# Altium PCB BLE-T1.PcbDoc (part 1 of 2)
Units mm, origin at the board's own origin, x right, y up, seen from the top; angles counter-clockwise.
Board outline 285.25 x 94.86 mm, 2 copper layers (Component Side, Bottom Layer), stack 1.571 mm thick; 182 components, 142 nets, 832 pads, 32 vias.
Unrouted connection lines stored in the file: 3.
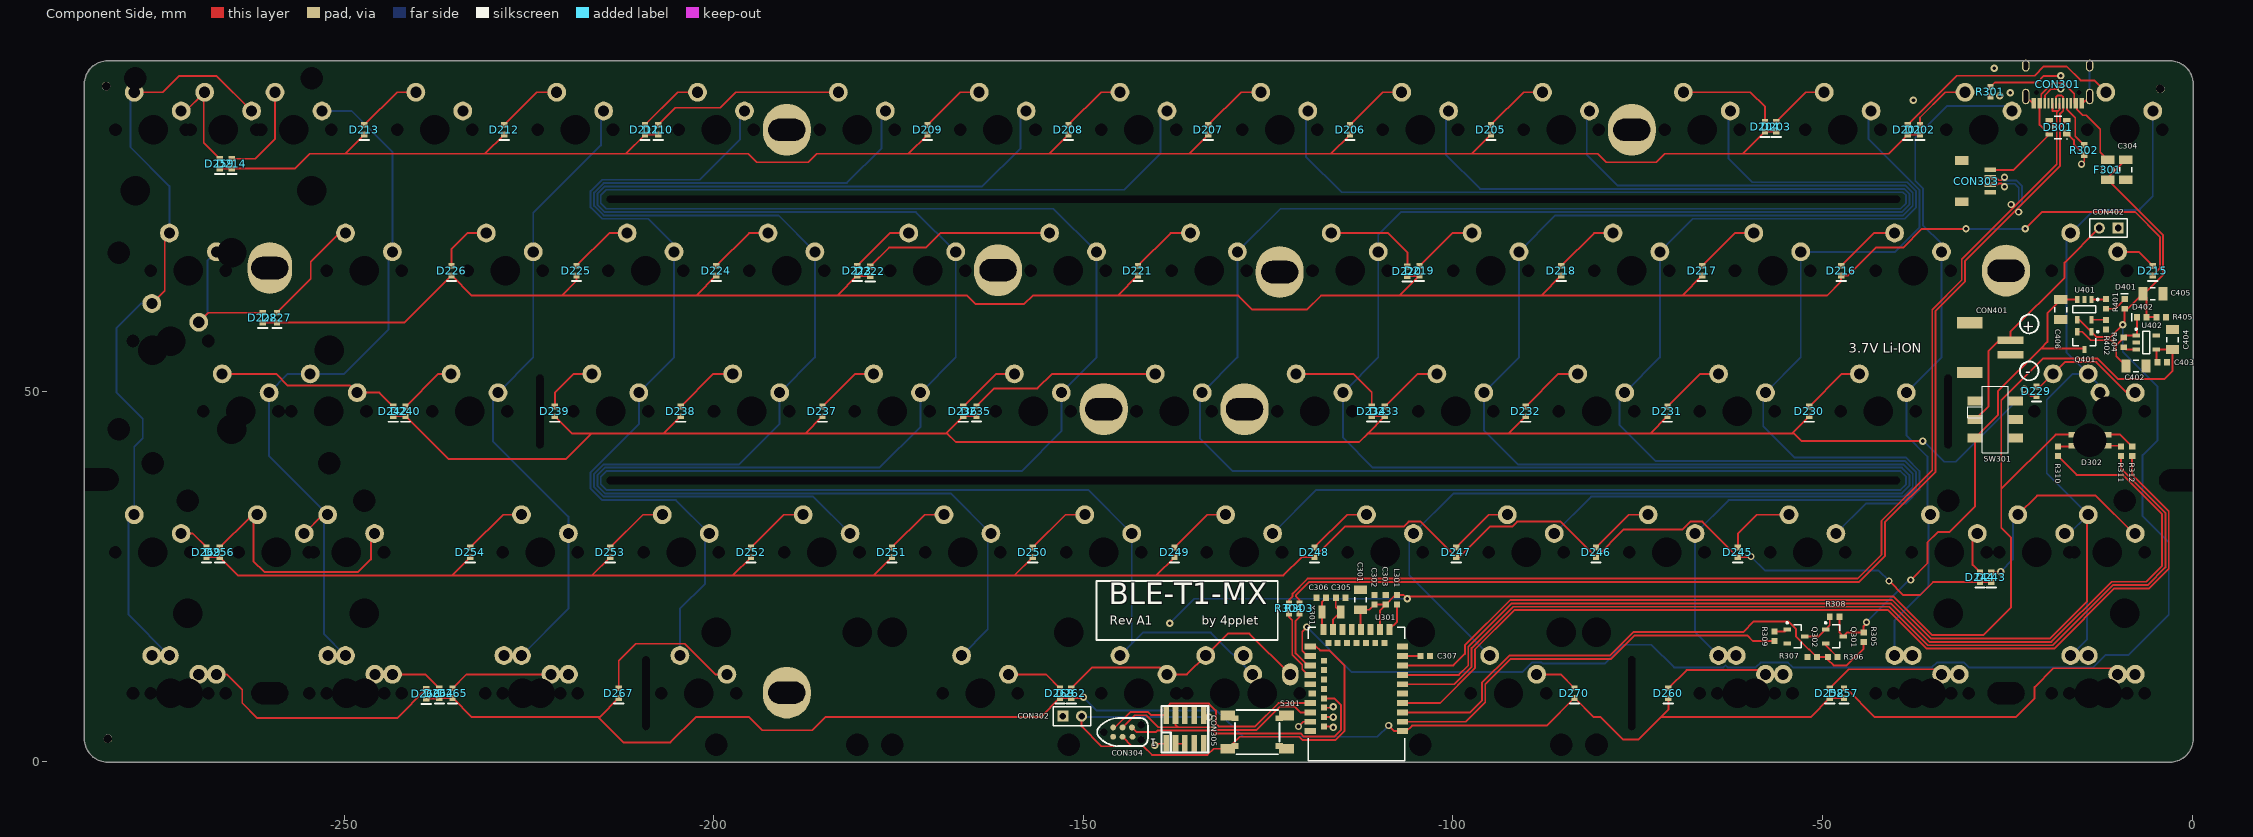
[diagram p0: Component Side view]
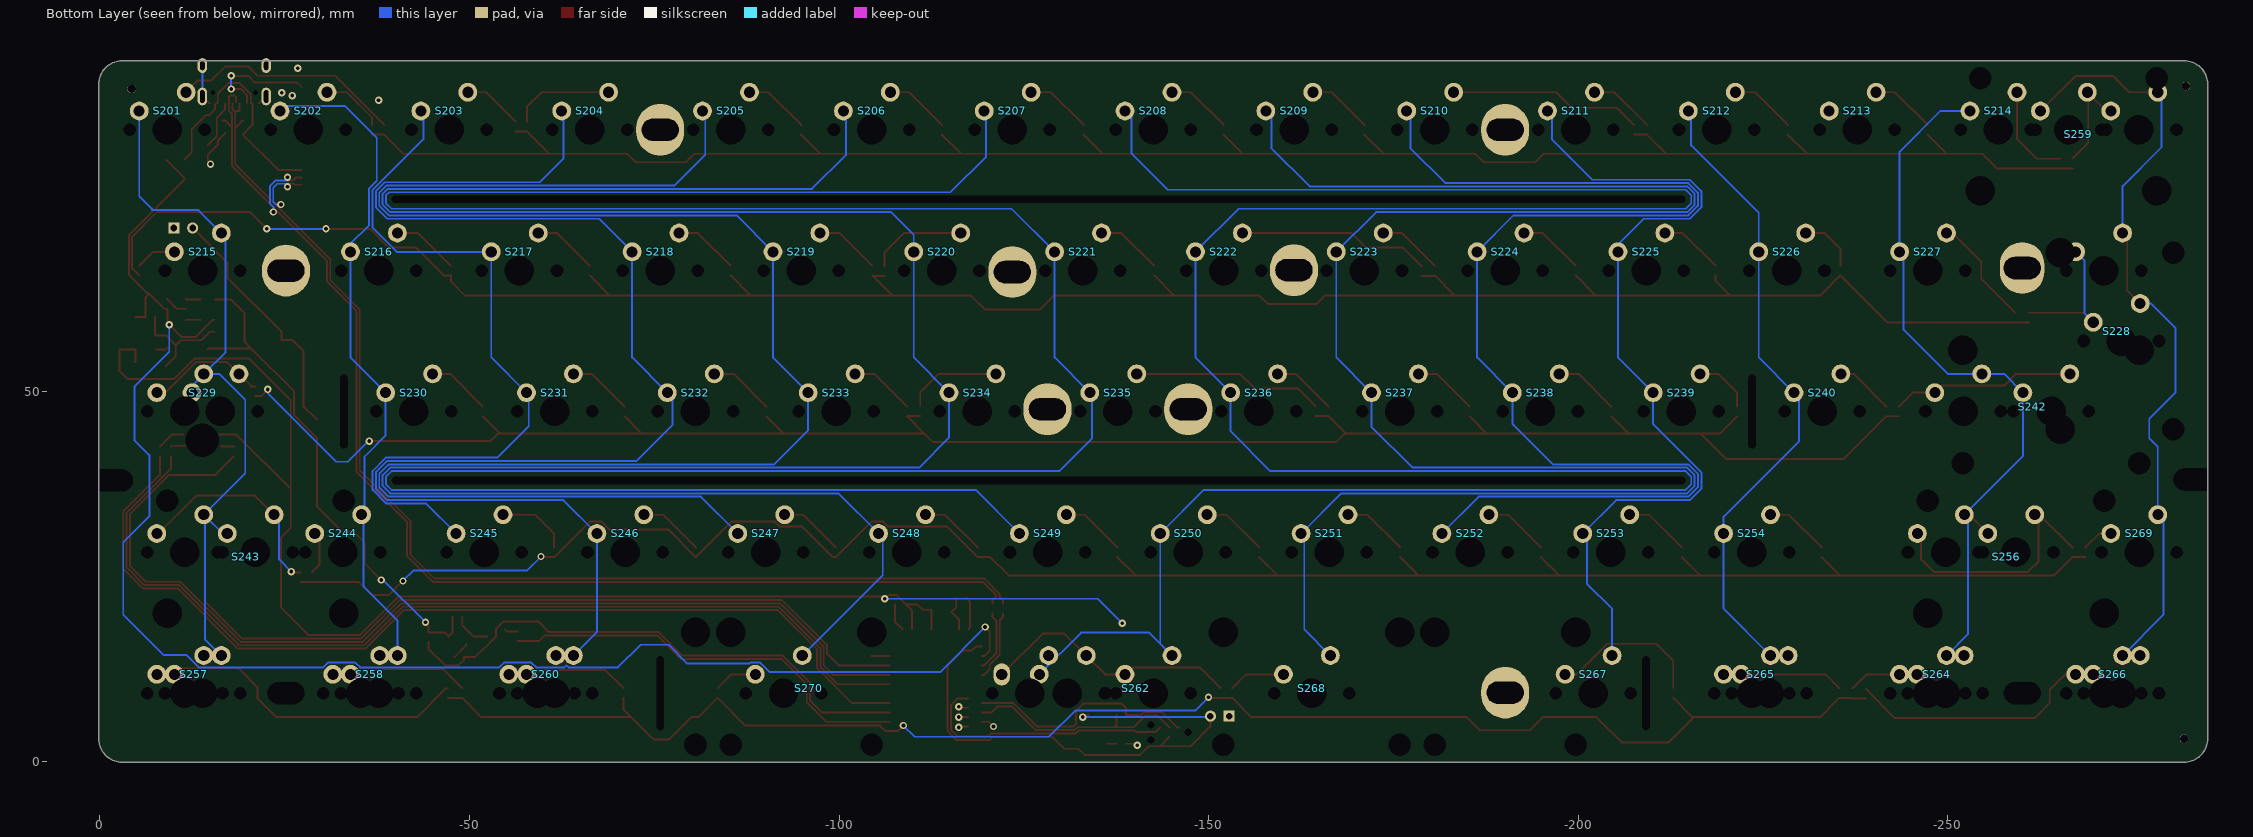
[diagram p1: Bottom Layer view, seen from below]
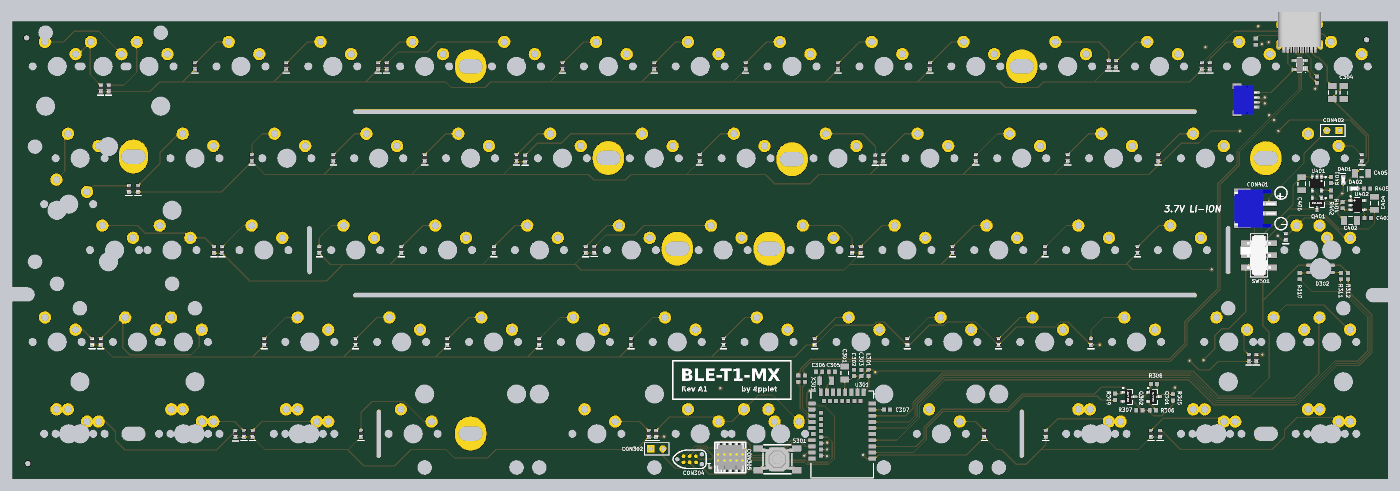
[diagram p3: 3D render of the assembled board from above, using the file's embedded part models]

## Layer stack, top to bottom
Top Solder: solder mask 0.0102, Solder Resist, Dk 3.5
Component Side: signal copper 0.0356
Dielectric 1: core 1.5, FR-4, Dk 4.2
Bottom Layer: signal copper 0.0356
Solder Side: solder mask 0.0102, Solder Resist, Dk 3.5

## Board outline
-285.127,3.01 ccw(c-282,3.01) -282,-0.117 ccw(c-282,0.01) -281.965,-0.112 -3.035,-0.112 ccw(c-3,0.01) -3,-0.117 ccw(c-3,3.01) 0.127,3.01 0.127,91.615 ccw(c-3,91.615) -3,94.742 ccw(c-3,94.615) -3.024,94.74 ccw(c-3.048,94.615) -3.048,94.742 -119.253,94.742 ccw(c-119.253,94.615) -119.273,94.741 ccw(c-119.294,94.615) -119.294,94.742 -198.628,94.742 ccw(c-198.628,94.615) -198.629,94.742 -282,94.742 ccw(c-282,91.615) -285.127,91.615

## Design rules (kind name [scope] priority, off if disabled: settings)
Clearance [All] p1: gap=0.2 ignorepadtopadclearanceinfootprint=FALSE except(0: Arc-Hole Track-Hole SMDPad-Hole THPad-Hole Via-Hole Fill-Hole Poly-Hole Region-Hole Text-Hole; 0.254: THPad-THPad THPad-Via THPad-Fill THPad-Poly THPad-Region THPad-Text Via-Via Via-Fill Via-Poly Via-Region Via-Text Fill-Fill Fill-Poly Fill-Region Fill-Text Poly-Poly Poly-Region Poly-Text Region-Region Region-Text Text-Text)
ComponentClearance [InComponent('No Component') And OnLayer('Component Side')] p1: gap=0.254 collisioncheckmode=3 verticalgap=0.254 showdistances=FALSE
DiffPairsRouting DiffPairsRouting_USB [InDifferentialPairClass('All Differential Pairs')] p1: maxlimit=0.254 minlimit=0.203 mostfreqgap=0.203 toplayer_minwidth=0.152 toplayer_maxwidth=0.381 toplayer_prefwidth=0.152 bottomlayer_minwidth=0.152 bottomlayer_maxwidth=0.381 bottomlayer_prefwidth=0.152 maxuncoupledlength=12.7
DiffPairsRouting [All] p2: maxlimit=0.254 minlimit=0.254 mostfreqgap=0.254 toplayer_minwidth=0.381 toplayer_maxwidth=0.381 toplayer_prefwidth=0.381 bottomlayer_minwidth=0.381 bottomlayer_maxwidth=0.381 bottomlayer_prefwidth=0.381 maxuncoupledlength=12.7
HoleSize [All] p1: absolutevalues=TRUE maxlimit=20 minlimit=0.025 maxpercent=80.000 minpercent=20.000
MatchedLengths MatchedLengths_USB_DiffPairs_1 [All] p1: tolerance=0.127 checknetsindiffpair=TRUE checkdiffpairvsdiffpair=FALSE checkxsignals=FALSE checkothers=FALSE
MatchedLengths MatchedLengths_USB_DiffPairs [All] p2: tolerance=0.127 checknetsindiffpair=TRUE checkdiffpairvsdiffpair=FALSE checkxsignals=FALSE checkothers=FALSE
PolygonConnect PolygonConnect_1 [All vs IsVia] p1: connectstyle=Direct reliefconductorwidth=0.254 reliefentries=4 polygonreliefangle="90 Angle" airgapwidth=0.254
PolygonConnect [All] p2: connectstyle=Relief reliefconductorwidth=0.254 reliefentries=4 polygonreliefangle="90 Angle" airgapwidth=0.254
RoutingVias [All] p1: holewidth=0.711 width=1.27 viastyle="Through Hole" minholewidth=0.711 minwidth=1.27 maxholewidth=0.711 maxwidth=1.27
SolderMaskExpansion [All] p1: expansion=0.102
Width [All] p1: maxlimit=0.254 minlimit=0.203 preferedwidth=0.254
27 further rules are at their usual default settings.

## Classes and differential pairs
component class Designator: C201 C202 C203 C204 C205 C206 D201 D202 D203 D204 D205 D206 D207 D208 D209 D210 D211 D212 D213 D214 D215 D216 D217 D218 D219 D220 D221 D222 D223 D224 D225 D226 D227 D228 D229 D230 D231 D232 D233 D234 D235 D236 D237 D238 D239 D240 D242 D243 D244 D245 D246 D247 D248 D249 D250 D251 D252 D253 D254 D256 D257 D258 D259 D260 D262 D264 D265 D266 D267 D268 D269 D270 S201 S202 S203 S204 S205 S206 S207 S208 S209 S210 S211 S212 S213 S214 S215 S216 S217 S218 S219 S220 S221 S222 S223 S224 S225 S226 S227 S228 S229 S230 S231 S232 S233 S234 S235 S236 S237 S238 S239 S240 S242 S243 S244 S245 S246 S247 S248 S249 S250 S251 S252 S253 S254 S256 S257 S258 S259 S260 S262 S264 S265 S266 S267 S268 S269 S270
differential pair D: +D_P -D_N
differential pair D_PRE: +D_PRE_P -D_PRE_N

## Components (designator, comment, footprint, x,y, rotation, side; value= is the part's Value field where it differs from the comment)
C301 "" C1206[3216] -112.522,21.844 r270 top value=10uF
C302 "" C0603[1608] -110.617,21.844 r270 top value=0.1uF
C303 "" C0603[1608] -109.093,21.829 r270 top value=0.1uF
C304 "" C1206[3216] -9.017,80.01 r90 top value=10uF
C305 "" C0603[1608] -115.204,22.098 r180 top
C306 "" C0603[1608] -117.841,22.098 r0 top
C307 "" C0603[1608] -103.759,14.224 r180 top value=0.1uF
C402 "" C1206[3216] -7.62,53.467 r180 top value=4.7uF
C403 "" C0603[1608] -4.079,53.975 r180 top value=1uF
C404 "" C1206[3216] -2.667,57.023 r270 top value=4.7uF
C405 "" C1206[3216] -5.334,63.246 r180 top value=4.7uF
C406 "" C1206[3216] -17.78,61.087 r90 top value=4.7uF
CON301 "TYPE-C-31-M-12" TYPE-C-31-M-12 -18.2,89 r180 top
CON302 "Header 2" HDR1X2#1 -152.781,6.096 r0 top
CON303 "Header 5" "JST SM04B-SRSS-TB" -31.18,81.278 r270 top
CON304 "TC2030-IDC" TC2030-IDC-NL -144.7,3.937 r0 top
CON305 "Pin Header 2x5, 1.27mm" HDR_2x5-SMD-1.27mm-K -136.271,4.318 r0 top
CON401 "JST S2B-PH-SM4-TB" "JST S2B-PH-SM4-TB" -30.099,52.609 r90 top
CON402 "Header 2" HDR1X2#2 -10.033,72.136 r180 top
D201 "Diode" D0603[1608] -38.481,85.415 r270 top
D202 "Diode" D0603[1608] -36.83,85.415 r270 top
D203 "Diode" D0603[1608] -56.261,85.852 r270 top
D204 "Diode" D0603[1608] -57.785,85.852 r270 top
D205 "Diode" D0603[1608] -94.869,85.415 r270 top
D206 "Diode" D0603[1608] -113.919,85.415 r270 top
D207 "Diode" D0603[1608] -133.096,85.415 r270 top
D208 "Diode" D0603[1608] -152.019,85.415 r270 top
D209 "Diode" D0603[1608] -171.069,85.415 r270 top
D210 "Diode" D0603[1608] -207.518,85.415 r270 top
D211 "Diode" D0603[1608] -209.296,85.415 r270 top
D212 "Diode" D0603[1608] -228.346,85.415 r270 top
D213 "Diode" D0603[1608] -247.269,85.415 r270 top
D214 "Diode" D0603[1608] -265.176,80.843 r270 top
D215 "Diode" D0603[1608] -5.334,66.365 r270 top
D216 "Diode" D0603[1608] -47.498,66.365 r270 top
D217 "Diode" D0603[1608] -66.294,66.365 r270 top
D218 "Diode" D0603[1608] -85.344,66.365 r270 top
D219 "Diode" D0603[1608] -104.521,66.365 r270 top
D220 "Diode" D0603[1608] -106.172,66.294 r270 top
D221 "Diode" D0603[1608] -142.621,66.365 r270 top
D222 "Diode" D0603[1608] -178.816,66.294 r270 top
D223 "Diode" D0603[1608] -180.594,66.365 r270 top
D224 "Diode" D0603[1608] -199.644,66.365 r270 top
D225 "Diode" D0603[1608] -218.567,66.365 r270 top
D226 "Diode" D0603[1608] -235.458,66.365 r270 top
D227 "Diode" D0603[1608] -259.08,60.015 r270 top
D228 "Diode" D0603[1608] -260.985,60.015 r270 top
D229 "Diode" D0603[1608] -21.082,50.038 r270 top
D230 "Diode" D0603[1608] -51.816,47.315 r270 top
D231 "Diode" D0603[1608] -70.993,47.315 r270 top
D232 "Diode" D0603[1608] -90.17,47.315 r270 top
D233 "Diode" D0603[1608] -109.22,47.315 r270 top
D234 "Diode" D0603[1608] -110.998,47.371 r270 top
D235 "Diode" D0603[1608] -164.465,47.371 r270 top
D236 "Diode" D0603[1608] -166.243,47.315 r270 top
D237 "Diode" D0603[1608] -185.293,47.315 r270 top
D238 "Diode" D0603[1608] -204.47,47.315 r270 top
D239 "Diode" D0603[1608] -221.488,47.315 r270 top
D240 "Diode" D0603[1608] -241.681,47.315 r270 top
D242 "Diode" D0603[1608] -243.332,47.315 r270 top
D243 "Diode" D0603[1608] -27.178,24.892 r270 top
D244 "Diode" D0603[1608] -28.702,24.892 r270 top
D245 "Diode" D0603[1608] -61.468,28.265 r270 top
D246 "Diode" D0603[1608] -80.645,28.265 r270 top
D247 "Diode" D0603[1608] -99.568,28.265 r270 top
D248 "Diode" D0603[1608] -118.745,28.265 r270 top
D249 "Diode" D0603[1608] -137.668,28.265 r270 top
D250 "Diode" D0603[1608] -156.845,28.265 r270 top
D251 "Diode" D0603[1608] -175.895,28.265 r270 top
D252 "Diode" D0603[1608] -194.945,28.265 r270 top
D253 "Diode" D0603[1608] -213.995,28.265 r270 top
D254 "Diode" D0603[1608] -232.918,28.265 r270 top
D256 "Diode" D0603[1608] -266.827,28.265 r270 top
D257 "Diode" D0603[1608] -47.117,9.215 r270 top
D258 "Diode" D0603[1608] -49.022,9.215 r270 top
D259 "Diode" D0603[1608] -266.827,80.843 r270 top
D260 "Diode" D0603[1608] -70.866,9.215 r270 top
D262 "Diode" D0603[1608] -151.638,9.215 r270 top
D264 "Diode" D0603[1608] -237.109,9.215 r270 top
D265 "Diode" D0603[1608] -235.331,9.215 r270 top
D266 "Diode" D0603[1608] -238.887,9.144 r270 top
D267 "Diode" D0603[1608] -212.852,9.215 r270 top
D268 "Diode" D0603[1608] -153.162,9.215 r270 top
D269 "Diode" D0603[1608] -268.605,28.265 r270 top
D270 "Diode" D0603[1608] -83.566,9.215 r270 top
D301 "PRTR5V0U2X" SOT190P237X120-4N -18.161,85.725 r180 top
D302 "QT QBLP677R-RGB" "QT QBLP677R-RGB" -13.857,43.422 r0 top
D401 "LED0" LED0603[1608] -9.144,61.849 r90 top
D402 "D402" LED0603[1608] -6.843,60.071 r180 top
F301 "Fuse Thermal" C1206[3216] -11.43,80.01 r90 top
L301 "Inductor" C0603[1608] -107.569,21.844 r270 top value=10mH
Q301 "PMOS-2" SOT-23-3 -48.387,16.891 r0 top
Q302 "MOSFET-N" SOT-23-3 -53.594,16.891 r0 top
Q401 "PMOS-2" SOT-23-3 -14.605,56.896 r270 top
R301 "Res1" R0603[1608] -27.305,90.551 r270 top value=5k1
R302 "Res1" R0603[1608] -14.605,82.677 r270 top value=5k1
R303 "Res1" R0603[1608] -120.777,20.659 r90 top value=22
R304 "Res1" R0603[1608] -122.174,20.659 r90 top value=22
R305 "Res1" R0603[1608] -44.45,16.764 r90 top value=DNM
R306 "Res1" R0603[1608] -48.641,14.097 r0 top value=TBD
R307 "Res1" R0603[1608] -51.42,14.097 r0 top value=TBD
R308 "Res1" R0603[1608] -48.387,19.558 r0 top value=10K
R309 "Res1" R0603[1608] -56.515,16.891 r270 top value=10K
R310 "Res1" R0603[1608] -18.161,41.91 r270 top value=100R
R311 "Res1" R0603[1608] -9.652,41.91 r270 top value=100R
R312 "Res1" R0603[1608] -8.128,41.91 r90 top value=150R
R401 "Res1" R0603[1608] -11.684,61.849 r90 top value=470R
R402 "Res1" R0603[1608] -11.684,59.055 r270 top value=5k1
R404 "Res1" R0603[1608] -9.271,56.642 r270 top value=100k
R405 "Res1" R0603[1608] -4.191,60.071 r0 top value=100k
S201 "MX" "MX-SWITCH - SWITCHED POL" -9.15,85.415 r180 bottom locked
S202 "MX" "MX-switch - switched pol" -28.2,85.415 r180 bottom locked
S203 "MX" "MX-SWITCH - SWITCHED POL" -47.25,85.415 r180 bottom locked
S204 "MX" "MX-switch - switched pol" -66.3,85.415 r180 bottom locked
S205 "MX" "MX-switch - switched pol" -85.35,85.415 r180 bottom locked
S206 "MX" "MX-switch - switched pol" -104.4,85.415 r180 bottom locked
S207 "MX" "MX-switch - switched pol" -123.45,85.415 r180 bottom locked
S208 "MX" "MX-switch - switched pol" -142.5,85.415 r180 bottom locked
S209 "MX" "MX-switch - switched pol" -161.55,85.415 r180 bottom locked
S210 "MX" "MX-switch - switched pol" -180.6,85.415 r180 bottom locked
S211 "MX" "MX-switch - switched pol" -199.65,85.415 r180 bottom locked
S212 "MX" "MX-switch - switched pol" -218.7,85.415 r180 bottom locked
S213 "MX" "MX-switch - switched pol" -237.75,85.415 r180 bottom locked
S214 "MX" "MX-switch - switched pol" -256.8,85.415 r180 bottom locked
S215 "MX" "MX-switch - 1.5U" -13.912,66.365 r180 bottom locked
S216 "MX" "MX-SWITCH - SWITCHED POL" -37.725,66.365 r180 bottom locked
S217 "MX" "MX-SWITCH - SWITCHED POL" -56.775,66.365 r180 bottom locked
S218 "MX" "MX-SWITCH - SWITCHED POL" -75.825,66.365 r180 bottom locked
S219 "MX" "MX-SWITCH - SWITCHED POL" -94.875,66.365 r180 bottom locked
S220 "MX" "MX-SWITCH - SWITCHED POL" -113.925,66.365 r180 bottom locked
S221 "MX" "MX-SWITCH - SWITCHED POL" -132.975,66.365 r180 bottom locked
S222 "MX" "MX-SWITCH - SWITCHED POL" -152.025,66.365 r180 bottom locked
S223 "MX" "MX-SWITCH - SWITCHED POL" -171.075,66.365 r180 bottom locked
S224 "MX" "MX-SWITCH - SWITCHED POL" -190.125,66.365 r180 bottom locked
S225 "MX" "MX-SWITCH - SWITCHED POL" -209.175,66.365 r180 bottom locked
S226 "MX" "MX-SWITCH - SWITCHED POL" -228.225,66.365 r180 bottom locked
S227 "MX" "MX-SWITCH - SWITCHED POL" -247.275,66.365 r180 bottom locked
S228 "MX" "MX-switch - PIPE_ISO_ENTER" -271.087,66.365 r0 bottom locked
S229 "MX" "MX-switch - CAPS" -16.294,47.315 r180 bottom locked
S230 "MX" "MX-SWITCH - SWITCHED POL" -42.487,47.315 r180 bottom locked
S231 "MX" "MX-SWITCH - SWITCHED POL" -61.537,47.315 r180 bottom locked
S232 "MX" "MX-SWITCH - SWITCHED POL" -80.587,47.315 r180 bottom locked
S233 "MX" "MX-SWITCH - SWITCHED POL" -99.637,47.315 r180 bottom locked
S234 "MX" "MX-SWITCH - SWITCHED POL" -118.687,47.315 r180 bottom locked
S235 "MX" "MX-SWITCH - SWITCHED POL" -137.737,47.315 r180 bottom locked
S236 "MX" "MX-SWITCH - SWITCHED POL" -156.787,47.315 r180 bottom locked
S237 "MX" "MX-SWITCH - SWITCHED POL" -175.837,47.315 r180 bottom locked
S238 "MX" "MX-SWITCH - SWITCHED POL" -194.887,47.315 r180 bottom locked
S239 "MX" "MX-SWITCH - SWITCHED POL" -213.937,47.315 r180 bottom locked
S240 "MX" "MX-SWITCH - SWITCHED POL" -232.987,47.315 r180 bottom locked
S242 "MX" "MX-switch - Enter_ANSI_ISO_KEY" -263.95,47.315 r180 bottom locked
S243 "MX" "MX-switch - Left shift" -21.056,28.265 r180 bottom locked
S244 "MX" MX-switch -32.893,28.265 r180 bottom
S245 "MX" "MX-SWITCH - SWITCHED POL" -52.012,28.265 r180 bottom locked
S246 "MX" "MX-SWITCH - SWITCHED POL" -71.062,28.265 r180 bottom locked
S247 "MX" "MX-SWITCH - SWITCHED POL" -90.112,28.265 r180 bottom locked
S248 "MX" "MX-SWITCH - SWITCHED POL" -109.162,28.265 r180 bottom locked
S249 "MX" "MX-SWITCH - SWITCHED POL" -128.212,28.265 r180 bottom locked
S250 "MX" "MX-SWITCH - SWITCHED POL" -147.262,28.265 r180 bottom locked
S251 "MX" "MX-SWITCH - SWITCHED POL" -166.312,28.265 r180 bottom locked
S252 "MX" "MX-SWITCH - SWITCHED POL" -185.362,28.265 r180 bottom locked
S253 "MX" "MX-SWITCH - SWITCHED POL" -204.412,28.265 r180 bottom locked
S254 "MX" "MX-SWITCH - SWITCHED POL" -223.462,28.265 r180 bottom locked
S256 "MX" "MX-switch - right shift" -259.207,28.265 r180 bottom
S257 "MX" "MX-switch - 1.5u MOD-L" -13.912,9.215 r180 bottom locked
S258 "MX" "MX-switch - 1u MOD-L" -37.719,9.215 r180 bottom
S259 "MX" "MX-SWITCH - BACKSPACE" -266.319,85.415 r180 bottom
S260 "MX" "MX-switch - 1.5u MOD-L" -61.537,9.215 r180 bottom locked
S262 "MX" "MX-SWITCH - SPACE_V3" -142.499,9.215 r180 bottom locked
S264 "MX" "MX-switch - 1u MOD-R" -247.269,9.215 r180 bottom
S265 "MX" "MX-switch - 1.5u MOD-R" -223.462,9.215 r180 bottom locked
S266 "MX" "MX-switch - 1.5u MOD-R" -271.087,9.215 r180 bottom locked
S267 "MX" MX-switch -202.031,9.215 r180 bottom
S268 "MX" "MX-switch - R split space_V2" -163.931,9.215 r0 bottom
S269 "MX" MX-SWITCH -275.85,28.265 r180 bottom locked
S270 "MX" "MX-switch - L split space_V2" -102.018,9.215 r0 bottom locked
S301 "SW-PB" "Combo switch" -126.492,3.937 r0 top
SW301 "MKH-22D14-G2-B" MKH-22D14-G2-B -26.626,46.228 r270 top
U301 "E73-2G4M08S1C" "E73-2G4M08S1C BLE-T1" -113.057,0.094 r0 top
U401 "MCP73831" SOT-23-5 -14.605,61.087 r270 top
U402 "AP2112" SOT-23-5 -6.223,56.642 r0 top
X301 "XTAL" "Seiko Epson Q13FC1350000400" -116.459,20.193 r0 top

## Footprints (in the part's own frame and the unit in brackets; to place one, negate y for a bottom-side part, rotate by r counter-clockwise, add the part's x,y. Pads: shape width x height; smd on the part's side, far side on the other; paste and mask are expansions set on the pad)
C0603[1608] [mm] "Chip Resistor, 2-Leads, Body 1,57x0,80mm, IPC Medium Density"
  rect 0.8x0.85 smd: 1(-0.65,0) 2(0.65,0)
  body extent -0.83,-0.43 0.82,0.43, height 0.5
C1206[3216] [mm]
  rect 1.2x1.8 smd: 1(-1.35,0) 2(1.35,0)
  silkscreen extent -0.35,-0.8 0.35,0.8, body extent -1.6,-0.9 1.6,0.9, height 1.2
"Combo switch" [mm] "Wurth Electronics Inc."
  rect 2x1.3 smd: 1(-3.975,2.25) 2(-3.975,-2.25) ""(3.975,-2.25) ""(3.975,2.25)
  rect 1x0.75 smd: 1(-3,1.875) 2(-3,-1.875) ""(3,-1.875) ""(3,1.875)
  round 1 on Mech15: ""(0,0)
  silkscreen extent -3,-3 3,3, body extent -3.25,-2.55 3.25,2.55, height 2
D0603[1608] [mm] "Chip Resistor, 2-Leads, Body 1,57x0,80mm, IPC Medium Density"
  rect 0.8x0.85 smd: 1(-0.65,0) 2(0.65,0)
  silkscreen extent 1.4,-0.63 1.4,0.64, body extent -0.8,-0.45 0.8,0.45, height 0.59
"E73-2G4M08S1C BLE-T1" [mm]
  rect 1.5x0.8 smd: 1(6.25,3.97) 2(6.25,5.24) 3(6.25,6.51) 4(6.25,7.78) 5(6.25,9.05) 6(6.25,10.32) 7(6.25,11.59) 8(6.25,12.86) 9(6.25,14.13) 10(6.25,15.4) 26(-6.25,15.4) 27(-6.25,14.13) 29(-6.25,12.86) 31(-6.25,11.59) 33(-6.25,10.32) 37(-6.25,7.78) 39(-6.25,6.51) 41(-6.25,5.24) 43(-6.25,3.97)
  rect 0.8x1.5 smd: 11(-4.45,17.75) 13(-3.18,17.75) 15(-1.91,17.75) 17(-0.64,17.75) 19(0.63,17.75) 21(1.9,17.75) 23(3.17,17.75) 25(4.44,17.75)
  rect 0.8x0.8 smd: 12(-3.81,15.9) 14(-2.54,15.9) 16(-1.27,15.9) 18(0,15.9) 20(1.27,15.9) 22(2.54,15.9) 24(3.81,15.9) 28(-4.4,13.495) 30(-4.4,12.225) 32(-4.4,10.955) 34(-4.4,9.685) 36(-4.4,8.415) 38(-4.4,7.145) 40(-4.4,5.875) 42(-4.4,4.605)
  rect 1x0.8 smd: 35(-6,9.05)
  silkscreen extent -6.5,0 6.5,18
HDR1X2#1 [mm] "Connector; Header; 2 Position"
  rect 1.5x1.5 hole 0.9 mask+0.102: 1(0,0)
  round 1.5 hole 0.9 mask+0.102: 2(2.54,0)
  silkscreen extent -1.27,-1.27 3.81,1.27
HDR1X2#2 [mm] "Connector; Header; 2 Position"
  rect 1.5x1.5 hole 0.9: 1(0,0)
  round 1.5 hole 0.9: 2(2.54,0)
  silkscreen extent -1.27,-1.27 3.81,1.27
HDR_2x5-SMD-1.27mm-K [mm]
  rect 0.76x2.4 smd: 1(-2.54,-1.95) 2(-2.54,1.95) 3(-1.27,-1.95) 4(-1.27,1.95) 5(0,-1.95) 6(0,1.95) 7(1.27,-1.95) 8(1.27,1.95) 9(2.54,-1.95) 10(2.54,1.95)
  silkscreen extent -3.17,-3.15 3.17,3.15, body extent -3.14,-2.92 3.14,2.92, height 6.11
"JST S2B-PH-SM4-TB" [mm]
  rect 1x3.5 smd: 1(4.35,-5.5) 2(2.35,-5.5)
  rect 1.5x3.4 smd: 3(0,0) 3(6.7,0)
  silkscreen extent -1.08,-9.31 7.81,-6.77, body extent -0.65,-6.95 7.25,1.65, height 5.5
"JST SM04B-SRSS-TB" [mm]
  rect 0.6x1.55 smd: 1(1.3,3.875) 2(2.3,3.875) 3(3.3,3.875) 4(4.3,3.875)
  rect 1.2x1.8 smd: 5(0,0) 5(5.6,0)
  body extent -0.21,-0.76 5.79,4.19, height 3.25
LED0603[1608] [mm] "Chip Resistor, 2-Leads, Body 1,57x0,80mm, IPC Medium Density"
  rect 0.8x0.85 smd: 1(-0.65,0) 2(0.65,0)
  silkscreen extent 1.37,-0.51 1.37,0.53, body extent -0.77,-0.4 0.83,0.4, height 0.8
MKH-22D14-G2-B [mm]
  rect 1.2x2 smd: 1(2.5,-2.75) 2(0,-2.75) 3(-2.5,-2.75) 4(2.5,2.75) 5(0,2.75) 6(-2.5,2.75)
  silkscreen extent -4.5,-3.75 4.5,1.75, body extent -4.25,-3.75 4.25,2.5, height 3.5
MX-switch [mm]
  round 2.54 hole 1.499 mask+0.102: 1(-3.81,2.54) 2(2.54,5.08)
  round 1 hole 1.702 unplated: ""(-5.08,0) ""(5.08,0)
  round 1 hole 3.988 unplated: ""(0,0)
MX-SWITCH [mm]
  round 2.54 hole 1.499 mask+0.102: 1(-3.81,2.54) 2(2.54,5.08)
  round 1 hole 1.702 unplated: ""(-5.08,0) ""(5.08,0)
  round 1 hole 3.988 unplated: ""(0,0)
"MX-switch - 1.5U" [mm]
  round 2.54 hole 1.499 mask+0.102: 1(-3.81,2.54) 2(2.54,5.08)
  round 1 hole 1.702 unplated: ""(-5.08,0) ""(5.08,0)
  round 1 hole 3.988 unplated: ""(0,0)
  round 1 on Mech14: ""(0,0)
"MX-switch - 1.5u MOD-L" [mm]
  round 2.54 hole 1.499 mask+0.102: 1(-6.191,2.54) 1(-3.81,2.54) 2(0.159,5.08) 2(2.54,5.08)
  round 1 hole 1.702 unplated: ""(-7.461,0) ""(-5.08,0) ""(2.699,0) ""(5.08,0)
  round 1 on Mech14: ""(-4.763,0) ""(-2.381,0) ""(0,0) ""(4.763,0)
  round 1 hole 3.988 unplated: ""(-2.381,0) ""(0,0)
"MX-switch - 1.5u MOD-R" [mm]
  round 2.54 hole 1.499 mask+0.102: 1(-3.81,2.54) 1(-1.429,2.54) 2(2.54,5.08) 2(4.921,5.08)
  round 1 hole 1.702 unplated: ""(-5.08,0) ""(-2.699,0) ""(5.08,0) ""(7.461,0)
  round 1 on Mech14: ""(-2.381,0) ""(0,0) ""(2.381,0) ""(4.763,0)
  round 1 hole 3.988 unplated: ""(0,0) ""(2.381,0)
"MX-switch - 1u MOD-L" [mm]
  round 2.54 hole 1.499 mask+0.102: 1(-6.191,2.54) 1(-3.81,2.54) 2(0.159,5.08) 2(2.54,5.08)
  round 1 hole 1.702 unplated: ""(-7.461,0) ""(-5.08,0) ""(2.699,0) ""(5.08,0)
  round 1 hole 3.988 unplated: ""(-2.381,0) ""(0,0)
  round 1 on Mech14: ""(-2.381,0) ""(0,0) ""(2.381,0)
"MX-switch - 1u MOD-R" [mm]
  round 2.54 hole 1.499 mask+0.102: 1(-3.81,2.54) 1(-1.429,2.54) 2(2.54,5.08) 2(4.921,5.08)
  round 1 hole 1.702 unplated: ""(-5.08,0) ""(-2.699,0) ""(5.08,0) ""(7.461,0)
  round 1 on Mech14: ""(-4.763,0) ""(-2.381,0) ""(0,0) ""(2.381,0)
  round 1 hole 3.988 unplated: ""(0,0) ""(2.381,0)
"MX-SWITCH - BACKSPACE" [mil]
  round 100 hole 59 mask+4: 1(100,200) 1(225,100) 2(-150,100) 2(475,200)
  round 60 hole 157.01 unplated: ""(-470,-325) ""(470,-325)
  round 60 hole 120 unplated: ""(-470,275) ""(470,275)
  round 39.37 hole 67.01 unplated: ""(-200,0) ""(175,0) ""(200,0) ""(575,0)
  round 39.37 hole 157.01 unplated: ""(0,0) ""(375,0)
  round 39.37 on Mech14: ""(0,0) ""(375,0)
"MX-switch - CAPS" [mm]
  round 2.54 hole 1.499 mask+0.102: 1(-8.572,2.54) 1(2.54,5.08) 2(-3.81,2.54) 2(-2.222,5.08)
  round 1 hole 1.702 unplated: ""(-9.842,0) ""(5.08,0)
  round 1 hole 3.988 unplated: ""(-4.763,0) ""(0,0)
  round 1 on Mech14: ""(-4.763,0) ""(0,0)
"MX-switch - Enter_ANSI_ISO_KEY" [mm]
  round 2.54 hole 1.499 mask+0.102: 1(-15.716,2.54) 1(2.54,5.08) 2(-9.366,5.08) 2(-3.81,2.54)
  round 1 hole 1.702 unplated: ""(-16.986,0) ""(-6.826,0) ""(-5.08,0) ""(5.08,0)
  round 1.524 hole 3.048 unplated: ""(-11.938,-6.985) ""(11.938,-6.985)
  round 1.524 hole 3.988 unplated: ""(-11.938,8.255) ""(11.938,8.255)
  round 1 hole 3.988 unplated: ""(-11.906,0) ""(0,0)
  round 1 on Mech14: ""(-11.906,0) ""(-11.906,0) ""(0,0) ""(0,0)
"MX-switch - L split space_V2" [mil]
  round 100 hole 59 mask+4: 1(525,-100) 2(275,-200)
  round 60 hole 157.01 unplated: ""(-95,-325)
  round 60 hole 120 unplated: ""(-95,275)
  round 39.37 hole 67.01 unplated: ""(175,0) ""(575,0)
  round 39.37 hole 157.01 unplated: ""(375,0)
  round 39.37 on Mech14: ""(375,0)
"MX-switch - Left shift" [mil]
  round 100 hole 59 mask+4: 1(-525,100) 1(100,200) 2(-275,200) 2(-150,100)
  round 39.37 hole 67.01 unplated: ""(-575,0) ""(-200,0) ""(-175,0) ""(200,0)
  round 60 hole 157.01 unplated: ""(-470,-325) ""(470,-325)
  round 60 hole 120 unplated: ""(-470,275) ""(470,275)
  round 39.37 hole 157.01 unplated: ""(-375,0) ""(0,0)
  round 39.37 on Mech14: ""(-375,0) ""(0,0)
"MX-switch - PIPE_ISO_ENTER" [mm]
  round 2.54 hole 1.499 mask+0.102: 1(1.429,6.985) 1(3.81,-2.54) 2(-4.921,4.445) 2(-2.54,-5.08)
  round 1.524 hole 3.048 unplated: ""(-9.366,-2.413) ""(-9.366,21.463)
  round 1 hole 1.702 unplated: ""(-7.461,9.525) ""(-5.08,0) ""(2.699,9.525) ""(5.08,0)
  round 1 hole 3.988 unplated: ""(-2.381,9.525) ""(0,0)
  round 1 on Mech14: ""(-2.381,9.525) ""(-2.381,9.525) ""(0,0) ""(0,0)
  round 1.524 hole 3.988 unplated: ""(5.874,-2.413) ""(5.874,21.463)
"MX-switch - R split space_V2" [mil]
  round 100 hole 59 mask+4: 1(150,-100) 2(-100,-200)
  round 60 hole 157.01 unplated: ""(-470,-325) ""(470,-325)
  round 60 hole 120 unplated: ""(-470,275) ""(470,275)
  round 39.37 hole 67.01 unplated: ""(-200,0) ""(200,0)
  round 39.37 hole 157.01 unplated: ""(0,0)
  round 39.37 on Mech14: ""(0,0)
"MX-switch - right shift" [mil]
  round 100 hole 59 mask+4: 1(-525,100) 1(100,200) 2(-275,200) 2(-150,100)
  round 39.37 hole 67.01 unplated: ""(-575,0) ""(-200,0) ""(-175,0) ""(200,0)
  round 60 hole 157.01 unplated: ""(-470,-325) ""(470,-325)
  round 60 hole 120 unplated: ""(-470,275) ""(470,275)
  round 39.37 hole 157.01 unplated: ""(-375,0) ""(0,0)
  round 39.37 on Mech14: ""(-375,0) ""(0,0)
"MX-SWITCH - SPACE_V3" [mm]
  oval 2.2x3 hole 1.499 mask+0.102: 1(-20.486,2.54)
  round 2.54 hole 1.499 mask+0.102: 1(-9.056,5.08) 1(-3.81,2.54) 2(-15.406,2.54) 2(-14.136,5.08) 2(2.54,5.08)
  round 1.524 hole 3.048 unplated: ""(-61.91,-6.985) ""(-57.15,-6.985) ""(38.09,-6.985) ""(57.15,-6.985)
  round 1.524 hole 3.988 unplated: ""(-61.91,8.255) ""(-57.15,8.255) ""(38.09,8.255) ""(57.15,8.255)
  round 1 hole 1.702 unplated: ""(-21.756,0) ""(-6.516,0) ""(-5.08,0) ""(5.08,0)
  round 1 hole 3.988 unplated: ""(-16.676,0) ""(-11.596,0) ""(0,0)
  round 1 on Mech14: ""(-16.676,0) ""(-11.596,0) ""(0,0)
"MX-SWITCH - SWITCHED POL" [mm]
  round 2.54 hole 1.499 mask+0.102: 1(2.54,5.08) 2(-3.81,2.54)
  round 1 hole 1.702 unplated: ""(-5.08,0) ""(5.08,0)
  round 1 hole 3.988 unplated: ""(0,0)
"MX-switch - switched pol" [mm]
  round 2.54 hole 1.499 mask+0.102: 1(2.54,5.08) 2(-3.81,2.54)
  round 1 hole 1.702 unplated: ""(-5.08,0) ""(5.08,0)
  round 1 hole 3.988 unplated: ""(0,0)
"QT QBLP677R-RGB" [mm]
  rect 1.2x0.7 smd: 1(-2.3,-0.75) 2(2.3,-0.75) 3(2.3,0.75) 4(-2.3,0.75)
  round 1 hole 4.5 unplated: ""(0,0)
  body extent -2.79,-1.4 2.79,1.4, height 0.88
R0603[1608] [mm] "Chip Resistor, 2-Leads, Body 1,57x0,80mm, IPC Medium Density"
  rect 0.8x0.85 smd: 1(-0.65,0) 2(0.65,0)
  body extent -0.83,-0.43 0.82,0.43, height 0.5
"Seiko Epson Q13FC1350000400" [mm] "32.768KHz ±20ppm 12.5pF 70kO"
  rect 1x1.8 smd: 1(-1.254,0) 2(1.254,0)
SOT190P237X120-4N [mm] "SOT143, 4-Leads, Body 3,00x2,37mm, Pitch 1,90mm, IPC Medium Density"
  rect 1x1 smd: 1(-1.2,0.75)
  rect 1x0.6 smd: 2(-1.2,-0.95) 3(1.2,-0.95) 4(1.2,0.95)
  silkscreen extent -1.25,-1.5 0.7,1.6, body extent -1.25,-1.5 1.24,1.5, height 1.09
SOT-23-3 [mm] "3.3v regulator, used in Windsond S2 proto 1"
  rect 1x0.55 smd: 1(-1.2,0.95) 2(-1.2,-0.95) 3(1.2,0)
  silkscreen extent -1.32,-1.55 0.7,1.95, body extent -1.45,-1.5 1.1,1.5, height 1
SOT-23-5 [mm]
  rect 1x0.55 smd: 1(-1.375,0.95) 2(-1.375,0) 3(-1.375,-0.95) 4(1.375,-0.95) 5(1.375,0.95)
  silkscreen extent -1.5,-1.55 0.46,1.93, body extent -1.63,-1.5 1.58,1.5, height 0.92
TC2030-IDC-NL [mm] "Tag-Connect 6-Pin with No Legs (PN# TC2030-IDC-NL)"
  round 0.9 hole 0.995 unplated: 0(-2.54,0) 0(2.54,-1.016) 0(2.54,1.016)
  round 0.79 smd paste-0.39: 1(-1.27,-0.635) 2(-1.27,0.635) 3(0,-0.635) 4(0,0.635) 5(1.35,-0.635) 6(1.27,0.635)
  silkscreen extent -3.43,-1.91 3.43,1.9
TYPE-C-31-M-12 [mm]
  rect 0.6x1.45 smd: A1B12(-3.25,0) A4B9(-2.45,0) B1A12(3.25,0) B4A9(2.45,0)
  rect 0.3x1.45 smd: A5(-1.25,0) A6(-0.25,0) A7(0.25,0) A8(1.25,0) B5(1.75,0) B6(0.75,0) B7(-0.75,0) B8(-1.75,0)
  oval 1x2.1 / inner oval 1x2.1 / far side oval 1.3x2.4 hole 0.6 slot 1.7 at 90 deg: S1(-4.32,-0.915) S1(4.32,-0.915)
  oval 1x1.6 / inner oval 1x1.6 / far side oval 1.3x2 hole 0.6 slot 1.2 at 90 deg: S1(-4.32,-5.095) S1(4.32,-5.095)
  round 0 hole 0.65 unplated: ""(-2.89,-1.445) ""(2.89,-1.445)
  body extent -4.47,-7.72 4.47,0.18, height 3.21

## Part data
C301 C304: library part Cap, "Capacitor", LCSC MFG=TDK, LCSCPN=C342827, MFG=KEMET, MFGPN=C1206C106M3PACTU, MRF.Part=C3216X7R1C106KT000N, Version="1206 imperial"
C302 C303 C307: library part Cap, "Capacitor", LCSC MFG=YAGEO, LCSCPN=C14663, MFG=KEMET, MFGPN=C0603C104M5RACTU, MRF.Part=CC0603KRX7R9BB104, Version="0603 imperial"
C305 C306 C402 C404 C405 C406: library part Cap, "Capacitor"
  C305 C306: Version="0603 imperial"
  C402 C404 C405 C406: Version="1206 imperial"
C403: library part Cap, "Capacitor", LCSC MFG="Guangdong Fenghua Advanced Tech", LCSCPN=C29823, MFG=KEMET, MFGPN=C0603C104M5RACTU, MRF.Part=1206B475K500NT, Version="0603 imperial"
CON301: LCSC MFG="Korean Hroparts Elec", LCSC Part #=C165948, MFG="Korean Hroparts Elec", MFGPN=TYPE-C-31-M-12, MRF.Part=TYPE-C-31-M-12
CON302 CON402: "Header, 2-Pin"
CON303: "JST for USB daughter board", LCSC MFG="JST Sales America", LCSC Part #=C160404, MFG="JST Sales America Inc.", MFGPN=SM04B-SRSS-TB(LF)(SN), MRF.Part=SM04B-SRSS-TB(LF)(SN)
CON304: library part "Header 3X2", "Header, 3-Pin, Dual row"
CON305: library part "Pin Header 2x5 SMD, 1.27mm, KS", "Pin Header 2x5, 1.27mm (50mil), SMD, Keying Shroud", MFG="Samtec Inc.", MFGPN=FTSH-105-01-F-DV-K-TR
D201 D202 D203 D204 D205 D206 D207 D208 D209 D210 D211 D212 D213 D214 D215 D216 D217 D218 D219 D220 D221 D222 D223 D224 D225 D226 D227 D228 D229 D230 D231 D232 D233 D234 D235 D236 D237 D238 D239 D240 D242 D243 D244 D245 D246 D247 D248 D249 D250 D251 D252 D253 D254 D256 D257 D258 D259 D260 D262 D264 D265 D266 D267 D268 D269 D270: "Default Diode", LCSC MFG="Brightking Elec (TAIWAN)", LCSC Part #=C109002, MFG="Bourns Inc.", MFGPN=CD0603-B0340R, MRF.Part=CD4148WTP, Version="0603 imperial"
D301: LCSC MFG="Brightking Elec (TAIWAN)", LCSC Part #=C78442, MFG="Nexperia USA Inc.", MFGPN=PRTR5V0U2X,215, MRF.Part=UET14A05L03
D302: "RGB LED", MFG="QT Brightek (QTB)", MFGPN=QBLP677R-RGB, Version="Common Anode RGB LED"
D401: "Typical INFRARED GaAs LED", MFG=Kingbright, MFGPN=AM2520SECK09
D402: library part LED0, "Typical INFRARED GaAs LED", MFG=Kingbright, MFGPN=AM2520SECK09
F301: "Thermal Fuse", LCSC MFG="Shenzhen JDT Fuse", LCSC Part #=C135338, MFG="Bel Fuse Inc.", MFGPN=0ZCJ0050FF2G, MRF.Part=ASMD1206-050
Q301 Q401: "P-Channel Power MOSFET", LCSCPN=C427395, ComponentLink1Description="Manufacturer Link", ComponentLink1URL=http://www.irf.com/, DatasheetVersion=PD-9.390D, LatestRevisionDate=17-Jul-2002, LatestRevisionNote="Re-released for DXP Platform.", MFGPN=BSS84-7-F, Note="Pin 4 not drawn and electrically connected to Pin 2.", PackageDescription="TO, Thru-Hole, Vertical, Heatsink Mounted; 3 In-Line Leads; Pitch 2.54 mm", PackageReference=TO-220AB, PackageVersion=Feb-1997, Published=8-Jun-2000, Publisher="Altium Limited"
Q302: "N-Channel MOSFET", LatestRevisionDate=17-Jul-2002, LatestRevisionNote="Re-released for DXP Platform.", LSCSPN=C501655, MFGPN=2N7002-7-F, PackageDescription="TO, Flat Index; 3 In-Line, Axial Leads; Body Dia. 4.6mm; Lead Dia. 0.5 mm (max)", PackageReference=E3, PackageVersion=1995/1996, Published=8-Jun-2000, Publisher="Altium Limited"
R301 R302: "Resistor", LCSC MFG="Uniroyal Elec", LCSC Part #=C23186, MFG="Panasonic Electronic Components", MFGPN=ERJ-3EKF5101V, MRF.Part=0603WAF5101T5E, Version="0603 imperial"
R303 R304: "Resistor", LCSC MFG="Uniroyal Elec", LCSC Part #=C23345, MFG="Panasonic Electronic Components", MFGPN=ERJ-3EKF5101V, MRF.Part=0603WAF220JT5E, Version="0603 imperial"
R305 R306 R307 R308 R309 R310 R311 R312 R401 R402 R404 R405: "Resistor", MFG="TE Connectivity Passive Product", Version="0603 imperial"
  R305 R306 R307 R308 R309 R312 R401 R402 R404 R405: MFGPN=CRGCQ0603F150R
  R310 R311: MFGPN=CRG0603J100R
S201 S202 S203 S204 S205 S206 S207 S208 S209 S210 S211 S212 S213 S214 S216 S217 S218 S219 S220 S221 S222 S223 S224 S225 S226 S227 S228 S229 S230 S231 S232 S233 S234 S235 S236 S237 S238 S239 S240 S242 S243 S244 S245 S246 S247 S248 S249 S250 S251 S252 S253 S254 S256 S257 S258 S259 S260 S262 S264 S265 S266 S267 S268 S269 S270: library part SW-PB, "Switch"
S215: library part SW-PB, "TAB"
S301: "Switch", LCSC MFG="XKB Enterprise", LCSCPN=C318888, MFG=C&K, MFGPN="PTS645SM43SMTR92 LFS", MRF.Part=TS-1187A-C-D-B
SW301: "Slide Switch DPDT", MFG="Nidec Copal Electronics", MFGPN=CL-SB-22B-11T
X301: "Crystal Oscillator", LCSC MFG="Seiko Epson", LCSC Part #=C32346, MRF.Part=Q13FC1350000400
CON401: MFG="JST Sales America Inc.", MFGPN=S2B-PH-SM4-TB(LF)(SN)
L301: Code_IEC=1005, Code_JEITA=0402, LatestRevisionDate=29-May-2009, LatestRevisionNote="IPC-7351 Footprint Added.", PackageDescription="Chip Inductor", PackageReference=0402-A, Published=8-Jun-2000, Publisher="Altium Limited"

## Free pads (board coordinates)
  oval 6.5x7 hole 3 slot 5 at 0 deg unplated: "5 degree"(-190.113,85.415) "5 degree"(-75.813,85.415) CHECK(-161.544,66.421) CHECK(-147.244,47.615) CHECK(-123.444,66.167)
  oval 6.5x7 hole 3 slot 5 at 0 deg: CHECK(-25.194,66.365) POKER(-190.113,9.271) TADA(-128.194,47.615)
  round 0 hole 3 slot 7 at 0 deg unplated: POKER(-283.994,38.115) POKER(-0.994,37.988)
  round 0 hole 3 slot 5 at 0 deg: POKER(-260.044,9.215) POKER(-25.194,9.215)
  oval 6x7 hole 3 slot 5 at 0 deg: POKER(-260.044,66.715)
  round 1.152 hole 1.152 unplated paste+0.148 mask+0.148: ""(-282.194,91.313) ""(-281.94,3.048) ""(-4.318,90.932)
  round 0 hole 1 slot 10 at 90 deg: ""(-223.52,47.315) ""(-209.169,9.215) ""(-75.819,9.215) ""(-33.02,47.315)
  round 0 hole 1 slot 175 at 0 deg: ""(-127,37.973) ""(-127,76.017)

## Via types
v1: diameter 1, hole 0.5, Component Side to Bottom Layer, tented both sides, 32 vias

## Nets (pads, with @x,y where several pads share a name; then routed paths per layer and width w, separated by ;. In a path a pad name is that pad's centre, name@x,y a point inside that pad or via, vN(x,y) a via of type N, cw(c..) or ccw(c..) an arc to the next point about the centre after c; other vN are vias at no path point)
AREF: C307.2 U301.9 | length 2.4
  Component Side w0.254: U301.9@-106.807,14.224 C307.2@-104.409,14.224
col1: S201.2 S215.2 S229.2 S243.2 S257.2 U301.8 | length 210.5
  Component Side w0.254: U301.8@-106.807,12.954 -99.949,12.954 -98.39,14.513 -98.39,15.677 -92.258,21.809 -40.584,21.809 -35.377,16.602 -19.233,16.602 -14.224,21.611 -14.224,33.192 S243.2@-14.071,33.345 ; S201.2@-5.34,87.955 S201.2@-5.334,87.949
  Bottom Layer w0.254: S243.2@-17.246,30.805 -16.611,30.805 S243.2@-14.224,33.192 ; S257.2@-16.452,14.295 -14.224,16.524 S243.2@-14.224,33.192 ; S229.2@-12.484,49.855 -12.484,50.808 S229.2@-14.071,52.395 ; S201.2@-5.34,87.955 -5.34,76.454 -7.051,74.743 -7.051,74.553 -13.345,74.553 S215.2@-16.452,71.445 -17.018,70.88 -17.018,55.342 S229.2@-14.071,52.395 ; S243.2@-14.224,33.192 S243.2@-14.071,33.345 -19.685,38.959 -19.685,48.895 -16.185,52.395 S229.2@-14.071,52.395
col2: S202.2 S216.2 S230.2 S244.2 S258.2 | length 92
  Bottom Layer w0.254: S258.2@-40.259,14.295 -40.259,19.05 -35.687,23.622 -35.687,33.091 S244.2@-35.433,33.345 -35.814,33.726 -35.814,41.206 -38.677,44.069 S230.2@-38.677,49.855 -33.915,54.618 S216.2@-33.915,68.905 -33.915,69.983 -36.449,72.517 -36.449,77.488 -37.465,78.504 -37.465,84.328 -33.147,88.646 -25.081,88.646 S202.2@-24.39,87.955
col3: S203.2 S217.2 S231.2 S245.2 | length 102.1
  Bottom Layer w0.254: S245.2@-48.202,30.805 -44.131,34.876 -38.717,34.876 -36.903,36.69 -36.903,39.256 -38.717,41.07 -53.77,41.07 -58.039,45.339 -58.039,49.544 S231.2@-57.727,49.855 -52.965,54.618 S217.2@-52.965,68.905 -40.188,68.905 -36.903,72.19 -36.903,77.3 -43.815,84.212 -43.815,87.58 S203.2@-43.44,87.955 S203.2@-43.623,88.138
col4: S204.2 S218.2 S232.2 S246.2 S260.2 | length 194
  Bottom Layer w0.254: S260.2@-64.077,14.295 -67.252,17.47 S246.2@-67.252,30.805 -62.727,35.33 -38.905,35.33 -37.357,36.878 -37.357,39.068 -38.905,40.616 -72.62,40.616 -77.47,45.466 -77.47,49.163 S232.2@-76.777,49.855 -72.015,54.618 S218.2@-72.015,68.905 -67.546,73.374 -38.905,73.374 -37.357,74.922 -37.357,77.112 -38.569,78.324 -59.528,78.324 -62.738,81.534 -62.738,87.707 S204.2@-62.49,87.955
col5: S205.2 S219.2 S233.2 S247.2 | length 249.4
  Bottom Layer w0.254: S247.2@-86.302,30.805 -81.323,35.784 -39.093,35.784 -37.811,37.066 -37.811,38.88 -39.093,40.162 -91.215,40.162 -95.827,44.775 S233.2@-95.827,49.855 -91.065,54.618 S219.2@-91.065,68.905 -86.142,73.828 -39.093,73.828 -37.811,75.11 -37.811,76.924 -38.757,77.87 -77.743,77.87 -81.915,82.042 -81.915,87.58 S205.2@-81.54,87.955
col6: S206.2 S220.2 S234.2 S248.2 S270.2 | length 346.5
  Bottom Layer w0.254: S206.2@-100.59,87.955 -100.965,87.58 -100.965,82.042 -96.339,77.416 -38.945,77.416 -38.265,76.736 -38.265,75.298 -39.281,74.282 -107.074,74.282 -110.115,71.241 S220.2@-110.115,68.905 -110.115,54.618 S234.2@-114.877,49.855 -114.877,43.759 -110.827,39.708 -39.281,39.708 -38.265,38.692 -38.265,37.254 -39.281,36.238 -99.919,36.238 S248.2@-105.352,30.805 -105.918,30.239 -105.918,25.18 S270.2@-95.033,14.295
col7: S207.2 S221.2 S235.2 S249.2 | length 398.3
  Bottom Layer w0.254: S249.2@-124.402,30.805 -118.515,36.692 -39.469,36.692 -38.719,37.442 -38.719,38.504 -39.469,39.254 -129.805,39.254 -134.239,43.688 -134.239,49.544 S235.2@-133.927,49.855 -129.165,54.618 S221.2@-129.165,68.905 -123.334,74.736 -39.469,74.736 -38.719,75.486 -38.719,76.548 -39.133,76.962 -115.062,76.962 -119.888,81.788 -119.888,87.707 S207.2@-119.64,87.955
col8: S208.2 S222.2 S236.2 S250.2 S262.2 | length 358.3
  Bottom Layer w0.254: S262.2@-145.039,14.295 -143.452,15.882 ; S208.2@-138.69,87.955 -139.573,87.072 -139.573,82.169 -144.444,77.298 -214.531,77.298 -215.281,76.548 -215.281,75.486 -214.531,74.736 -154.046,74.736 S222.2@-148.215,68.905 -148.215,54.618 S236.2@-152.977,49.855 -152.977,44.635 -158.358,39.254 -214.531,39.254 -215.281,38.504 -215.281,37.442 -214.531,36.692 -149.339,36.692 S250.2@-143.452,30.805 -143.452,15.882 ; S262.2@-127.093,11.755 -132.737,17.399 -141.935,17.399 -143.452,15.882
col9: S209.2 S223.2 S237.2 S251.2 S268.2 | length 265.2
  Bottom Layer w0.254: S268.2@-166.471,14.295 -162.941,17.825 -162.941,30.366 S251.2@-162.502,30.805 -167.935,36.238 -214.719,36.238 -215.735,37.254 -215.735,38.692 -214.719,39.708 -177.589,39.708 -172.027,45.27 S237.2@-172.027,49.855 -167.265,54.618 S223.2@-167.265,68.905 -172.642,74.282 -214.719,74.282 -215.735,75.298 -215.735,76.736 -214.719,77.752 -163.675,77.752 -158.496,82.931 -158.496,87.199 S209.2@-157.74,87.955
col10: S210.2 S224.2 S238.2 S252.2 | length 173.1
  Bottom Layer w0.254: S252.2@-181.552,30.805 -186.531,35.784 -214.907,35.784 -216.189,37.066 -216.189,38.88 -214.907,40.162 -196.566,40.162 -191.077,45.651 S238.2@-191.077,49.855 -186.315,54.618 S224.2@-186.315,68.905 -191.238,73.828 -214.907,73.828 -216.189,75.11 -216.189,76.924 -214.907,78.206 -199.125,78.206 -199.125,78.232 -181.991,78.232 -177.292,82.931 -177.292,87.453 S210.2@-176.79,87.955
col11: S211.2 S225.2 S239.2 S253.2 S267.2 | length 117.1
  Bottom Layer w0.254: S267.2@-204.571,14.295 -204.571,20.6 -201.168,24.003 -201.168,30.239 S253.2@-200.602,30.805 -205.127,35.33 -215.095,35.33 -216.643,36.878 -216.643,39.068 -210.127,45.583 S239.2@-210.127,49.855 -205.365,54.618 S225.2@-205.365,68.905 -205.365,69.862 -208.877,73.374 -215.095,73.374 -216.643,74.922 -216.643,77.112 -215.095,78.66 -201.883,78.66 -196.469,84.074 -196.469,87.326 S211.2@-195.84,87.955